# Altium PCB Sintetizador_BA.PcbDoc
Units mm, origin at the board's own origin, x right, y up, seen from the top; angles counter-clockwise.
Board outline 64.64 x 55 mm, 2 copper layers (Top Layer, Bottom Layer), stack 1.571 mm thick; 53 components, 50 nets, 183 pads, 2 vias.
Unrouted connection lines stored in the file: 2.
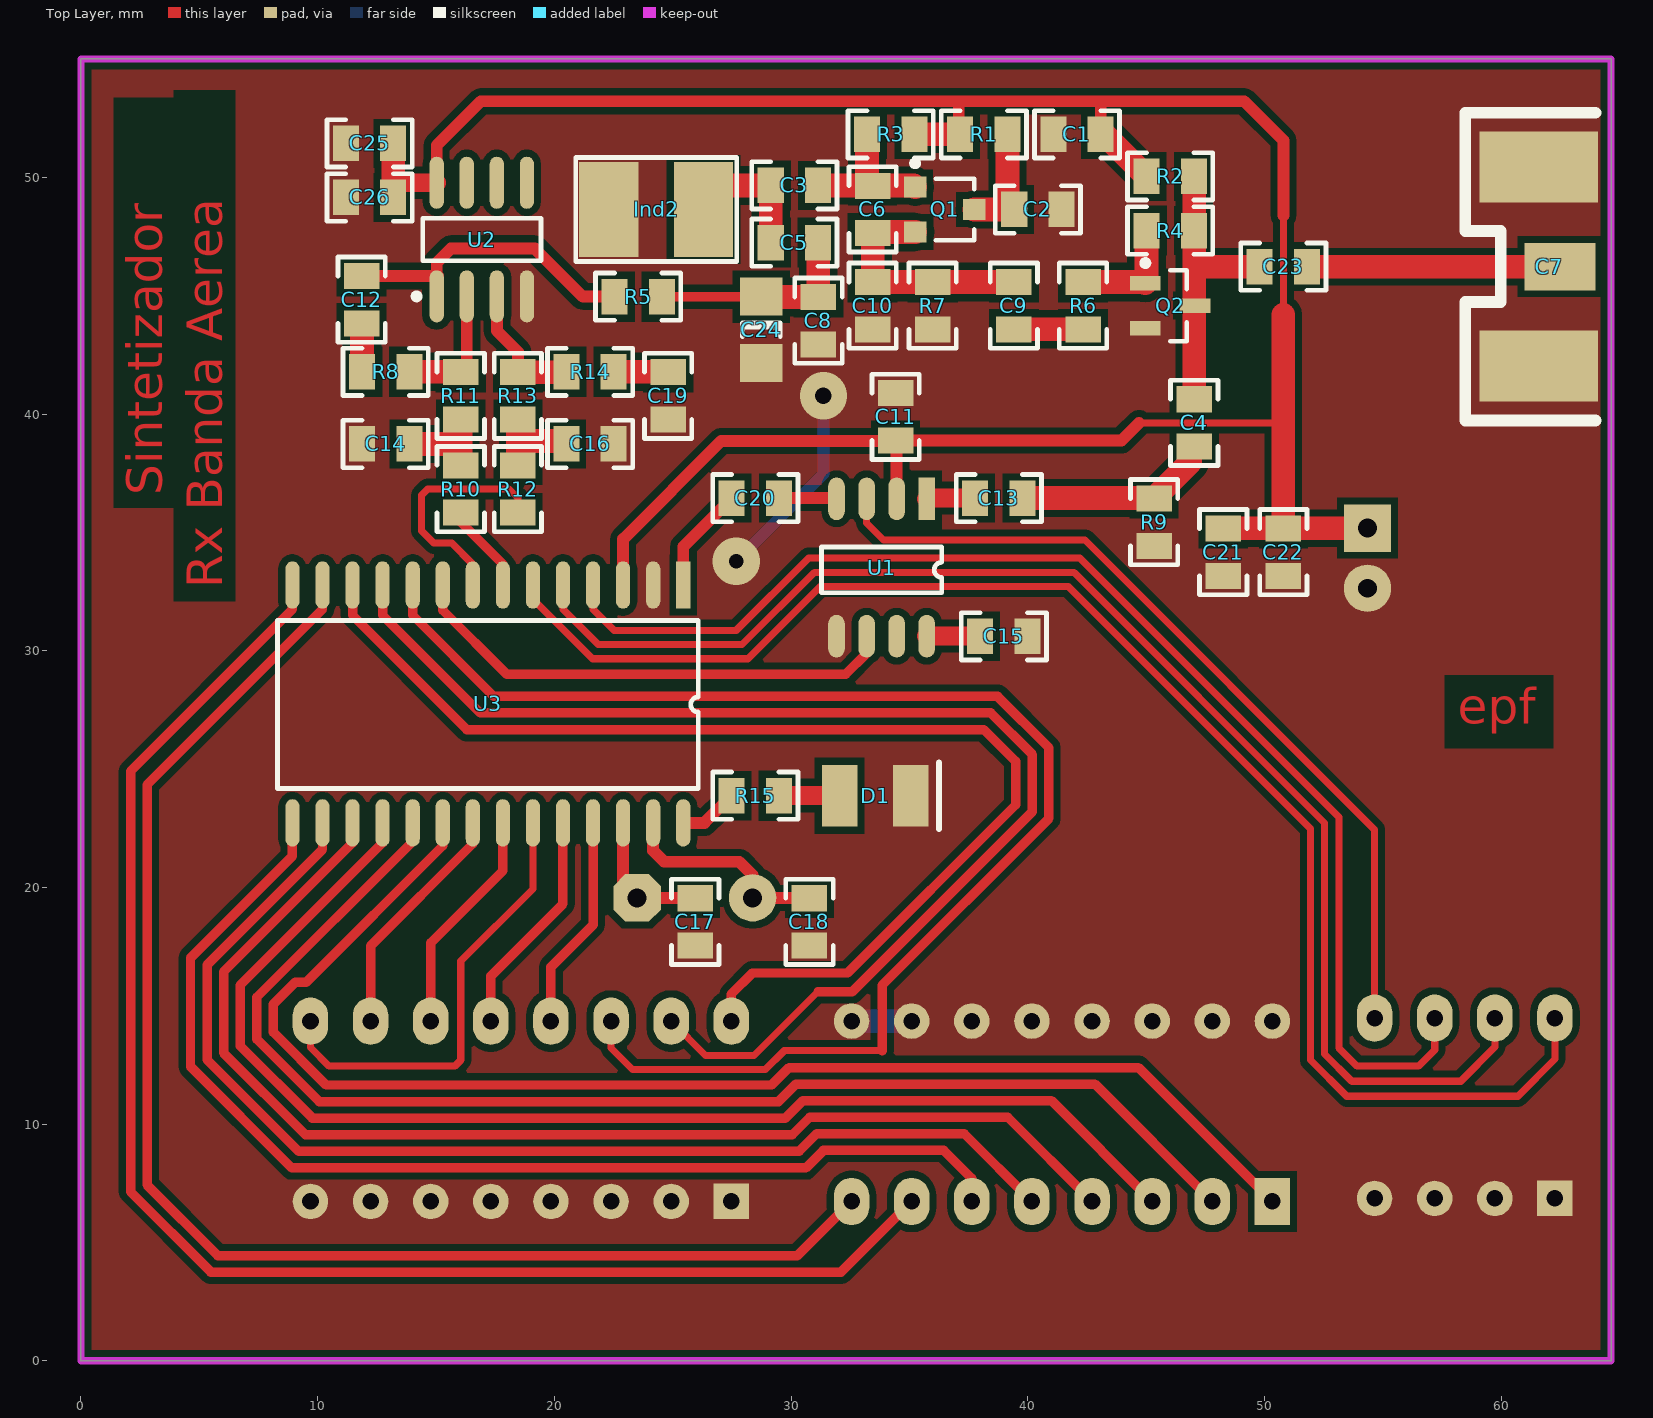
[diagram p0: Top Layer view]
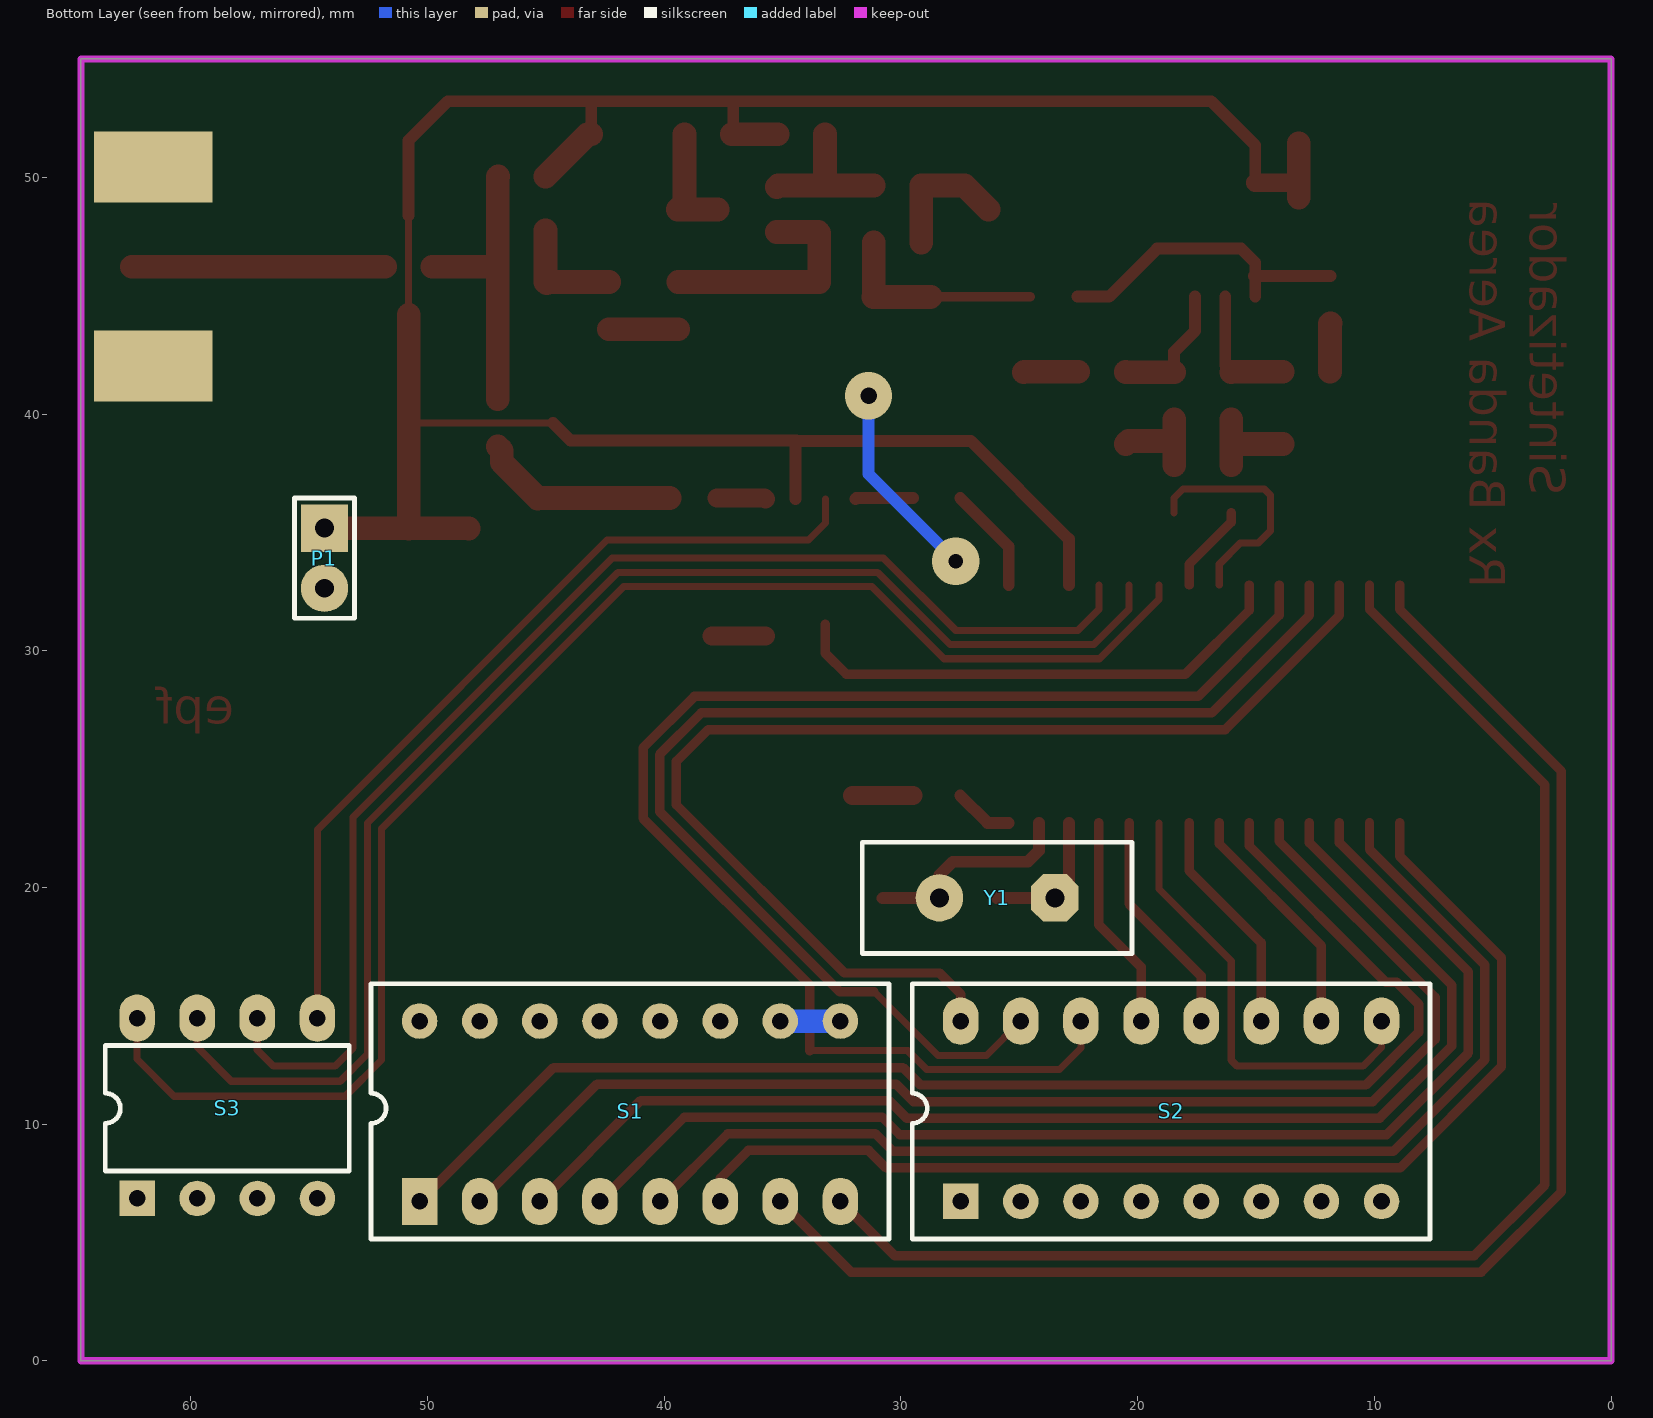
[diagram p1: Bottom Layer view, seen from below]
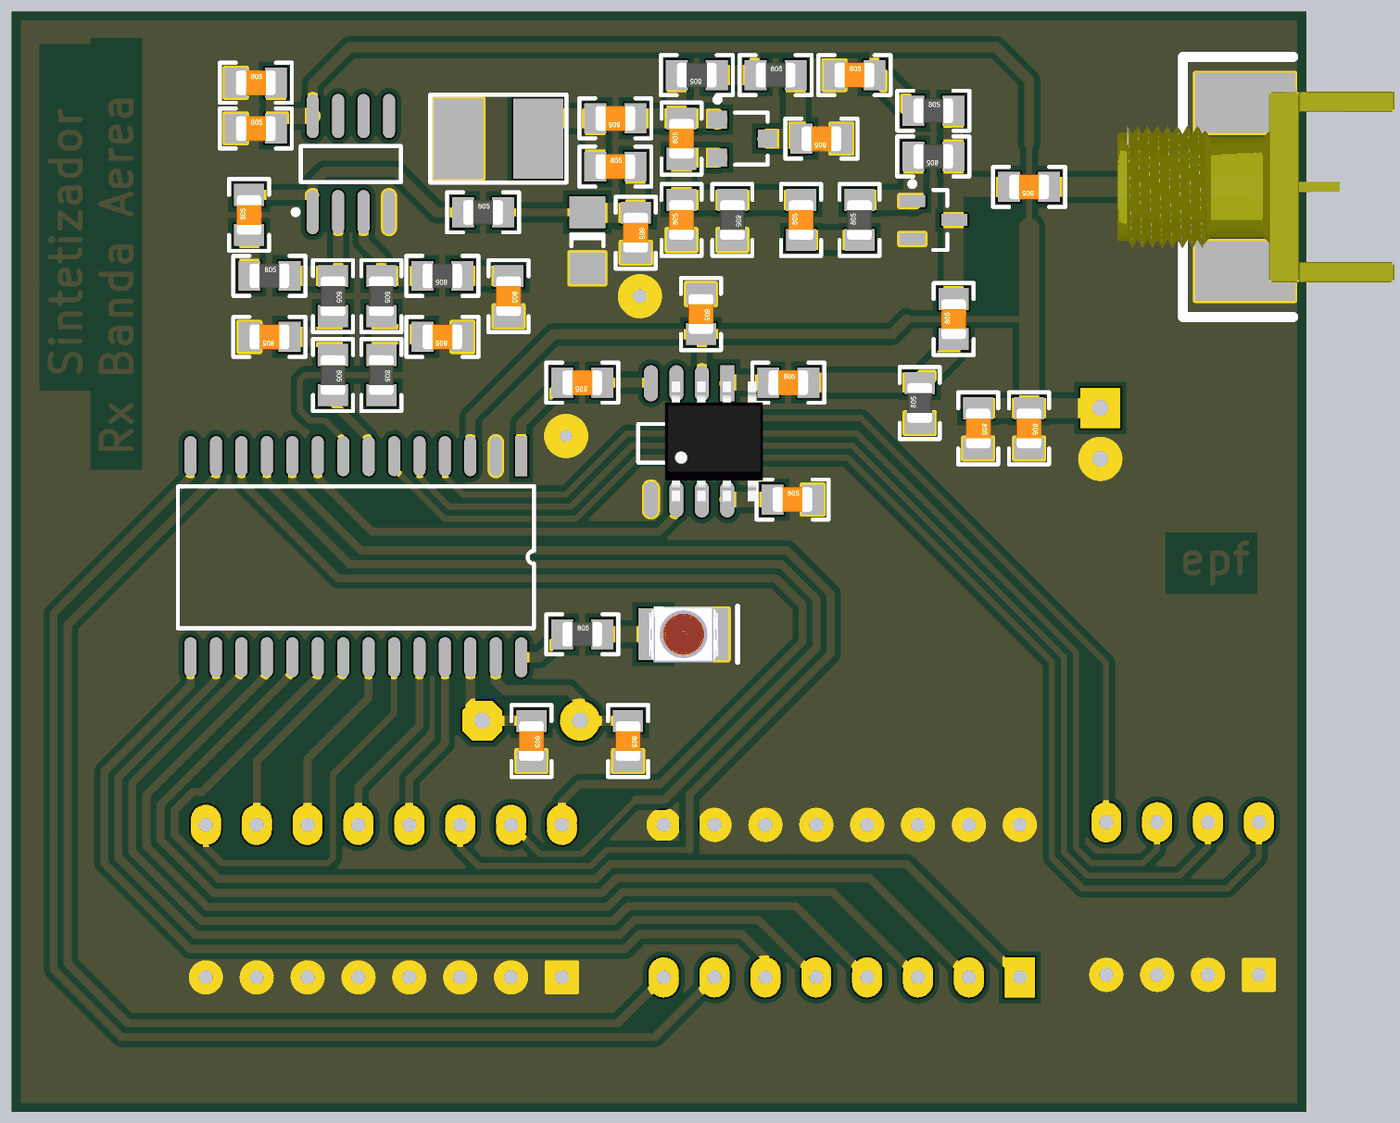
[diagram p2: 3D render of the assembled board from above, using the file's embedded part models]

## Layer stack, top to bottom
Top Layer: signal copper 0.0356
Dielectric: core 1.5, FR-4, Dk 4.8
Bottom Layer: signal copper 0.0356

## Board outline
0,0 0,55 64.643,55 64.643,0

## Design rules (kind name [scope] priority, off if disabled: settings)
Clearance [All] p1: gap=0.3
PolygonConnect [All] p1: connectstyle=Direct reliefconductorwidth=0.254 reliefentries=4 polygonreliefangle="90 Angle"
RoomDefinition Sintetizador_BA [InComponentClass('Sintetizador_BA')] p1: confinementstyle=ConfineIn formatcopy=TRUE lockcomponents=FALSE outline -0.381,0.127 74.422,0.127 74.422,55.372 -0.381,55.372
RoutingVias [All] p1: holewidth=0.6 width=2 viastyle="Through Hole" minholewidth=0.3 minwidth=1.27 maxholewidth=1 maxwidth=3
SilkscreenOverComponentPads [All] p1: minsilkscreentomaskgap=0
SolderMaskExpansion [All] p1: expansion=0.102
TestPointUsage [All] p1: valid=0 allowmultiple=FALSE
Testpoint [All] p1: side=15 testpointundercomponent=TRUE minsize=1.016 maxsize=2.54 preferedsize=1.524 minholesize=0 maxholesize=1.016 preferedholesize=0.813 testpointgrid=0.025 style=1023 order=0-112345678
Width [All] p1: maxlimit=3 minlimit=0.3 preferedwidth=1
23 further rules are at their usual default settings.

## Components (designator, comment, footprint, x,y, rotation, side; value= is the part's Value field where it differs from the comment)
C1 "Capacitor" 0805_CAP 42.081,51.816 r0 top
C2 "Capacitor" 0805_CAP 40.43,48.641 r180 top
C3 "Capacitor" 0805_CAP 30.143,49.657 r180 top
C4 "Capacitor" 0805_CAP 47.034,39.624 r270 top
C5 "Capacitor" 0805_CAP 30.143,47.244 r0 top
C6 "Capacitor" 0805_CAP 33.445,48.641 r270 top
C7 "SMA" SMAL2 62.484,46.228 r270 top
C8 "Capacitor" 0805_CAP 31.159,43.942 r90 top
C9 "Capacitor" 0805_CAP 39.414,44.577 r270 top
C10 "Capacitor" 0805_CAP 33.445,44.577 r270 top
C11 "Capacitor" 0805_CAP 34.417,39.878 r90 top
C12 "Capacitor" 0805_CAP 11.855,44.831 r270 top
C13 "Capacitor" 0805_CAP 38.779,36.449 r0 top
C14 "Capacitor" 0805_CAP 12.871,38.735 r180 top
C15 "Capacitor" 0805_CAP 38.989,30.607 r0 top
C16 "Capacitor" 0805_CAP 21.507,38.735 r180 top
C17 "Capacitor" 0805_CAP 25.952,18.542 r90 top
C18 "Capacitor" 0805_CAP 30.778,18.542 r90 top
C19 "Capacitor" 0805_CAP 24.809,40.767 r90 top
C20 "Capacitor" 0805_CAP 28.492,36.449 r180 top
C21 "Capacitor" 0805_CAP 48.26,34.163 r90 top
C22 "Capacitor" 0805_CAP 50.8,34.163 r90 top
C23 "Capacitor" 0805_CAP 50.8,46.228 r180 top
C24 "Cap Semi" C1206 28.746,43.561 r270 top
C25 "Capacitor" 0805_CAP 12.192,51.435 r0 top
C26 "Capacitor" 0805_CAP 12.192,49.149 r0 top
D1 "LED" PLCC-2Rojo 32.048,23.876 r270 top
Ind2 "Ind2" Ind_4mm 24.301,48.641 r0 top
P1 "Header 2" HDR1X2 54.356,35.179 r270 bottom
Q1 "BFS17" SOT-23 36.493,48.641 r270 top
Q2 "BFS17" SOT23_N 46.018,44.577 r0 top
R1 "Resistor" 0805_RES 38.144,51.816 r0 top
R2 "Resistor" 0805_RES 46.018,50.038 r0 top
R3 "Resistor" 0805_RES 34.207,51.816 r180 top
R4 "Resistor" 0805_RES 46.018,47.752 r180 top
R5 "Resistor" 0805_RES 23.539,44.958 r0 top
R6 "Resistor" 0805_RES 42.335,44.577 r270 top
R7 "Resistor" 0805_RES 35.985,44.577 r90 top
R8 "Resistor" 0805_RES 12.871,41.783 r0 top
R9 "Resistor" 0805_RES 45.339,35.433 r270 top
R10 "Resistor" 0805_RES 16.046,36.83 r90 top
R11 "Resistor" 0805_RES 16.046,40.767 r90 top
R12 "Resistor" 0805_RES 18.459,36.83 r90 top
R13 "Resistor" 0805_RES 18.459,40.767 r90 top
R14 "Resistor" 0805_RES 21.507,41.783 r180 top
R15 "Resistor" 0805_RES 28.492,23.876 r0 top
S1 "SW-DIP8" DIP-16-KEY#1 50.336,6.731 r180 bottom
S2 "SW-DIP8" DIP-16-KEY#2 27.476,6.731 r180 bottom
S3 "SW-DIP4" DIP-8 58.464,10.668 r180 bottom
U1 "DualModule" SO-8_2 35.731,36.415 r270 top
U2 "MC1458D" 751-05_N 16.935,47.371 r90 top
U3 "PLL" SOG28 25.444,32.776 r270 top
Y1 "ECS-10-13-1" HC-49U 25.936,19.558 r0 bottom

## Footprints (in the part's own frame and the unit in brackets; to place one, negate y for a bottom-side part, rotate by r counter-clockwise, add the part's x,y. Pads: shape width x height; smd on the part's side, far side on the other; paste and mask are expansions set on the pad)
751-05_N [mm] "SOIC, 8-Leads, Body 4.9x3.9mm, Pitch 1.27mm, IPC Medium Density"
  oval 2.2x0.6 smd: 1(-2.4,1.905) 2(-2.4,0.635) 3(-2.4,-0.635) 4(-2.4,-1.905) 5(2.4,-1.905) 6(2.4,-0.635) 7(2.4,0.635) 8(2.4,1.905)
  silkscreen extent -2.52,-2.5 0.9,2.88, body extent -1.95,-2.45 1.95,2.45, height 1.75
0805_CAP [mm]
  rect 1.1x1.5 smd: 1(-1,0) 2(1,0)
  silkscreen extent -1.8,-1 1.8,1, body extent -1,-0.62 1,0.63, height 0.78
0805_RES [mm]
  rect 1.1x1.5 smd: 1(-1,0) 2(1,0)
  silkscreen extent -1.8,-1 1.8,1, body extent -1,-0.62 1,0.63, height 0.78
C1206 [mm] "Chip Capacitor; Body 3.2 x 1.6 mm (LxW typ)"
  rect 1.6x1.8 smd: 1(-1.4,0) 2(1.4,0)
  silkscreen extent -0.3,-0.8 0.3,0.8
DIP-8 [mm] "DIP; 8 Leads; Row Spacing 7.62 mm; Pitch 2.54 mm"
  rect 1.5x1.5 hole 0.7: 1(-3.81,-3.81)
  round 1.5 hole 0.7: 2(-1.27,-3.81) 3(1.27,-3.81) 4(3.81,-3.81)
  oval 1.5x2 hole 0.7: 5(3.81,3.81) 6(1.27,3.81) 7(-1.27,3.81) 8(-3.81,3.81)
  silkscreen extent -5.15,-2.65 5.15,2.65
DIP-16-KEY#1 [mm] "DIP; 16 Leads; Row Spacing 7.62 mm; Pitch 2.54 mm"
  rect 1.5x2 hole 0.7: 1(0,0)
  oval 1.5x2 hole 0.7: 2(2.54,0) 3(5.08,0) 4(7.62,0) 5(10.16,0) 6(12.7,0) 7(15.24,0) 8(17.78,0)
  round 1.5 hole 0.7: 9(17.78,7.62) 10(15.24,7.62) 11(12.7,7.62) 12(10.16,7.62) 13(7.62,7.62) 14(5.08,7.62) 15(2.54,7.62) 16(0,7.62)
  silkscreen extent -2.05,-1.59 19.83,9.2
DIP-16-KEY#2 [mm] "DIP; 16 Leads; Row Spacing 7.62 mm; Pitch 2.54 mm"
  rect 1.5x1.5 hole 0.7: 1(0,0)
  round 1.5 hole 0.7: 2(2.54,0) 3(5.08,0) 4(7.62,0) 5(10.16,0) 6(12.7,0) 7(15.24,0) 8(17.78,0)
  oval 1.5x2 hole 0.7: 9(17.78,7.62) 10(15.24,7.62) 11(12.7,7.62) 12(10.16,7.62) 13(7.62,7.62) 14(5.08,7.62) 15(2.54,7.62) 16(0,7.62)
  silkscreen extent -2.05,-1.59 19.83,9.2
HC-49U [mm] "Quartz Crystal, Thru-Hole; 2 Leads; Body 11.35 x 4.65 x 13.46 mm (LxWxH max)"
  oct 2x2 hole 0.8: 1(-2.44,0)
  round 2 hole 0.8: 2(2.44,0)
  silkscreen extent -5.7,-2.35 5.7,2.35
HDR1X2 [mm] "Connector; Header; 2 Position"
  rect 2x2 hole 0.8: 1(0,0)
  round 2 hole 0.8: 2(2.54,0)
  silkscreen extent -1.27,-1.27 3.81,1.27
Ind_4mm [mm]
  rect 2.5x4 smd: 1(-2,0) 2(2,0)
  silkscreen extent -3.4,-2.2 3.4,2.2
PLCC-2Rojo [mm]
  rect 2.6x1.5 smd: 1(0,0) 2(0,3)
  silkscreen extent -1.4,4.2 1.4,4.2, body extent -1.4,-0.25 1.4,3.25, height 1.75
SMAL2 [mm]
  rect 2x3 smd: 1(0,0)
  rect 3x5 smd: 2(-4.2,-0.9) 4(4.2,-0.9)
  rect 3x5 smd far side: 3(-4.2,-0.9) 5(4.2,-0.9)
  silkscreen extent -6.5,-4 6.5,1.5, body extent -4.76,-2.95 4.76,10.88, height 4.06
SO-8_2 [mm]
  rect 1.8x0.7 smd: 1(0,0)
  oval 1.8x0.7 smd: 2(0,-1.27) 3(0,-2.54) 4(0,-3.81) 5(5.8,-3.81) 6(5.8,-2.54) 7(5.8,-1.27) 8(5.8,0)
  silkscreen extent 2.03,-4.44 3.97,0.64, body extent -0.09,-4.38 5.9,0.52, height 1.6
SOG28 [mm]
  rect 2x0.6 smd: 1(0,0)
  oval 2x0.6 smd: 2(0,-1.27) 3(0,-2.54) 4(0,-3.81) 5(0,-5.08) 6(0,-6.35) 7(0,-7.62) 8(0,-8.89) 9(0,-10.16) 10(0,-11.43) 11(0,-12.7) 12(0,-13.97) 13(0,-15.24) 14(0,-16.51) 15(10.05,-16.51) 16(10.05,-15.24) 17(10.05,-13.97) 18(10.05,-12.7) 19(10.05,-11.43) 20(10.05,-10.16) 21(10.05,-8.89) 22(10.05,-7.62) 23(10.05,-6.35) 24(10.05,-5.08) 25(10.05,-3.81) 26(10.05,-2.54) 27(10.05,-1.27) 28(10.05,0)
  silkscreen extent 1.5,-17.14 8.6,0.64, body extent 1.5,-17.15 8.6,0.64, height 1.5
SOT23_N [mm] "SOT23, 3-Leads, Body 2.9x1.3mm, Pitch 0.95mm, Lead Span 2.3mm, IPC Medium Density"
  rect 1.3x0.6 smd: 1(-1.05,0.95) 2(-1.05,-0.95) 3(1.05,0)
  silkscreen extent -1.17,-1.5 0.7,1.92, body extent -0.7,-1.5 0.7,1.5, height 1.1
SOT-23 [mm] "SOT-23; 3 Leads; Body 3.0 x 2.6 mm, inc. leads (LxW max)"
  rect 0.9x0.95 smd: 1(-0.95,-1.25) 2(0.95,-1.25) 3(0,1.25)
  silkscreen extent -2.07,-1.37 1.3,1.25

## Part data
C1 C2 C3 C4 C5 C6 C8 C9 C10 C11 C12 C13 C14 C15 C16 C17 C18 C19 C20 C21 C22 C23 C25 C26: library part Cap
C24: "Capacitor (Semiconductor SIM Model)"
D1: library part LED1
P1: "Header, 2-Pin"
Q1 Q2: "NPN 1 GHz Wideband Transistor"
R1 R2 R3 R4 R5 R6 R7 R8 R9 R10 R11 R12 R13 R14 R15: library part Res
S1 S2: "4009 Series DIP Switch, Raised actuator"
S3: "DIP Switch"
U1: library part MC12054ASD
U2: "Dual Operational Amplifier, Internally Compensated"
U3: library part MC145152P2, "PLL paralelo doble modulo"
Y1: "Crystal Oscillator"

## Via types
v1: diameter 2, hole 0.6, Top Layer to Bottom Layer, 1 vias
v2: diameter 2, hole 0.7, Top Layer to Bottom Layer, 1 vias

## Nets (pads, with @x,y where several pads share a name; then routed paths per layer and width w, separated by ;. In a path a pad name is that pad's centre, name@x,y a point inside that pad or via, vN(x,y) a via of type N, cw(c..) or ccw(c..) an arc to the next point about the centre after c; other vN are vias at no path point)
A0: S2.9 U3.23 | length 19.2
  Top Layer w0.3: S2.9 9.696,13.23 10.48,12.446 15.792,12.446 16.046,12.7 16.046,16.891 19.094,19.939 U3.23
A1: S2.10 U3.21 | length 10.2
  Top Layer w0.4: S2.10 12.236,17.526 16.554,21.844 U3.21
A2: S2.11 U3.22 | length 9.6
  Top Layer w0.4: S2.11 14.776,17.653 17.824,20.701 U3.22
A3: S2.12 U3.24 | length 9.6
  Top Layer w0.4: S2.12 17.316,16.256 20.364,19.304 U3.24
A4: S2.13 U3.25 | length 9.1
  Top Layer w0.4: S2.13 19.856,16.637 21.634,18.415 U3.25
A5: S2.14 U3.10 | length 59.5
  Top Layer w0.3: S2.14 22.396,13.208 23.303,12.301 28.911,12.301 29.711,13.101 33.846,13.101
  Top Layer w0.4: U3.10 14.014,31.496 17.44,28.07 38.724,28.07 40.894,25.9 40.894,22.912 33.846,15.864 33.846,13.101
FIN: C20.1 U1.4 | length 2.4
  Top Layer w0.5: C20.1 31.887,36.449 U1.4
GND: C1.1 C2.1 C7.2 C7.3 C7.4 C7.5 C8.1 C10.2 C11.2 C14.2 C15.2 C16.1 C17.1 C18.1 C19.1 C21.1 C22.1 C24.2 C25.1 C26.1 D1.2 Ind2.1 P1.2 Q2.2 R7.1 R9.2 S1.9 S1.10 S1.11 S1.12 S1.13 S1.14 S1.15 S1.16 S2.1 S2.2 S2.3 S2.4 S2.5 S2.6 S2.7 S2.8 S3.1 S3.2 S3.3 S3.4 U1.5 U2.4 U3.2 | length 11.1
  Bottom Layer w0.5: v1(27.686,33.782) 31.369,37.465 v2(31.369,40.767)
  Bottom Layer w1: S1.9 S1.10
LD: R15.1 U3.28 | length 2.5
  Top Layer w0.5: U3.28 26.342,22.726 R15.1
MC: U1.6 U3.9 | length 21.7
  Top Layer w0.4: U3.9 15.284,31.706 17.979,29.011 32.313,29.011 33.191,29.889 U1.6@33.191,31.115
N0: S2.15 U3.11 | length 53.7
  Top Layer w0.3: S2.15 26.386,12.901 28.439,12.901 31.139,15.601
  Top Layer w0.4: U3.11 12.744,31.496 16.87,27.37 38.434,27.37 40.194,25.61 40.194,23.202 32.593,15.601 31.139,15.601
N1: S2.16 U3.12 | length 50.2
  Top Layer w0.4: U3.12 11.474,31.496 16.3,26.67 38.144,26.67 39.494,25.32 39.494,23.492 32.385,16.383 28.365,16.383 27.476,15.494 S2.16
N2: S1.8 U3.13 | length 60.4
  Top Layer w0.4: U3.13 10.204,31.75 2.794,24.34 2.794,7.431 5.78,4.445 30.27,4.445 S1.8
N3: S1.7 U3.14 | length 64.1
  Top Layer w0.4: U3.14 8.934,31.75 2.094,24.91 2.094,7.141 5.49,3.745 32.11,3.745 S1.7
N4: S1.6 U3.15 | length 48.6
  Top Layer w0.4: U3.15 8.934,21.324 4.628,17.018 4.628,12.429 8.906,8.151 30.63,8.151 31.369,8.89 36.449,8.89 37.636,7.703 S1.6
N5: S1.5 U3.16 | length 50
  Top Layer w0.4: U3.16 10.204,21.605 5.328,16.729 5.328,12.719 9.196,8.851 30.34,8.851 31.079,9.59 37.317,9.59 S1.5
N6: S1.4 U3.17 | length 51.9
  Top Layer w0.4: U3.17 11.474,21.885 6.028,16.439 6.028,13.009 9.486,9.551 30.05,9.551 30.789,10.29 39.157,10.29 S1.4
N7: S1.3 U3.18 | length 53.8
  Top Layer w0.4: U3.18 12.744,21.888 6.728,15.872 6.728,13.299 9.776,10.251 29.76,10.251 30.499,10.99 40.997,10.99 S1.3
N8: S1.2 U3.19 | length 55.7
  Top Layer w0.4: U3.19 14.014,21.945 7.428,15.359 7.428,13.589 10.066,10.951 29.47,10.951 30.209,11.69 42.837,11.69 S1.2
N9: S1.1 U3.20 | length 57.9
  Top Layer w0.4: U3.20 15.284,21.761 9.525,16.002 9.061,16.002 8.128,15.069 8.128,13.879 10.356,11.651 29.18,11.651 29.919,12.39 44.677,12.39 S1.1
NetC2_2: C2.2 Q1.3 R1.2 | length 5
  Top Layer w1: Q1.3 C2.2 39.144,48.927 R1.2
NetC3_1: C3.1 C6.1 Q1.1 R3.2 | length 6.4
  Top Layer w1: C3.1 C6.1@33.429,49.657 ; R3.2 33.207,49.879 C6.1@33.429,49.657 ; C6.1 C6.1@33.429,49.657 ; Q1.1 35.177,49.657 C6.1@33.429,49.657
NetC3_2: C3.2 C5.1 Ind2.2 | length 5.7
  Top Layer w1: Ind2.2 27.317,49.657 C3.2 C5.1
NetC4_1: C4.1 C23.2 Q2.3 R2.2 R4.1 | length 12.2
  Top Layer w1: R2.2 47.034,50.022 47.034,47.752 47.034,46.101 ; C4.1 47.034,46.101 ; C23.2 47.161,46.228 47.034,46.101
NetC5_2: C5.2 C8.2 C24.1 R5.2 | length 8.9
  Top Layer w0.4: R5.2 28.743,44.958 C24.1 ; C8.2@31.143,44.958 C8.2
  Top Layer w1: C24.1 28.765,44.942 C8.2 ; C8.2@31.143,44.958 C5.2
NetC6_2: C6.2 C9.1 C10.1 Q1.2 R7.2 | length 9.9
  Top Layer w1: Q1.2 33.495,47.691 C6.2 C10.1 R7.2 C9.1
NetC7_1: C7.1 C23.1 | length 10.7
  Top Layer w1: C23.1 C7.1
NetC9_2: C9.2 R6.2 | length 2.9
  Top Layer w1: C9.2 R6.2
NetC12_2: C12.2 R8.1 | length 2.1
  Top Layer w1: C12.2 11.871,43.815 R8.1
NetC13_1: C13.1 U1.1 | length 2.1
  Top Layer w0.8: U1.1 35.765,36.449 C13.1
NetC14_1: C14.1 R10.2 R11.1 | length 4.1
  Top Layer w1: C14.1 16.046,38.735 ; R10.2 16.046,38.735 ; R11.1 16.046,38.735
NetC15_1: C15.1 U1.8 | length 2.3
  Top Layer w0.5: C15.1@37.981,30.615 C15.1
  Top Layer w0.8: U1.8 C15.1@37.981,30.615
NetC16_2: C16.2 R12.2 R13.1 | length 4
  Top Layer w1: R12.2 18.459,38.862 ; R13.1 18.459,38.862 ; C16.2 20.38,38.862 18.459,38.862
NetC17_2: C17.2 U3.26 Y1.1 | length 5.9
  Top Layer w0.5: U3.26 22.904,20.15 Y1.1 25.936,19.558 C17.2
NetC18_2: C18.2 U3.27 Y1.2 | length 9.2
  Top Layer w0.5: U3.27 24.174,21.546 24.638,21.082 27.813,21.082 28.376,20.519 Y1.2 30.762,19.558 C18.2
NetC19_2: C19.2 R14.1 | length 2.3
  Top Layer w1: R14.1 24.793,41.783 C19.2
NetC20_2: C20.2 U3.1 | length 4.5
  Top Layer w0.5: U3.1 25.444,34.401 C20.2
NetD1_1: D1.1 R15.2 | length 2.6
  Top Layer w0.8: R15.2 D1.1
NetQ2_1: Q2.1 R4.2 R6.1 | length 4.9
  Top Layer w1: R6.1 44.918,45.577 Q2.1 45.018,45.577 R4.2
NetR8_2: R8.2 R11.2 U2.2 | length 5.5
  Top Layer w0.5: R11.2 16.046,41.799 16.3,42.053 U2.2
  Top Layer w1: R8.2 16.03,41.783 R11.2
NetR10_1: R10.1 U3.7 | length 3.8
  Top Layer w0.4: R10.1 16.046,35.433 17.824,33.655 U3.7
NetR12_1: R12.1 U3.8 | length 10.1
  Top Layer w0.3: U3.8 16.554,33.655 15.665,34.544 14.903,34.544 14.395,35.052 14.395,36.576 14.649,36.83 18.078,36.83 18.459,36.449 R12.1
NetR13_2: R13.2 R14.2 U2.3 | length 5.6
  Top Layer w0.5: U2.3 17.57,43.517 18.459,42.628 R13.2
  Top Layer w1: R13.2 20.491,41.767 R14.2
OL: C4.2 C13.2 R9.1 | length 8.5
  Top Layer w1: C13.2 45.323,36.449 R9.1 46.863,37.957 46.863,38.453 C4.2
RA0: S3.6 U3.4 | length 54.5
  Top Layer w0.3: U3.4 21.634,31.75 22.523,30.861 27.686,30.861 30.734,33.909 42.21,33.909 53.143,22.976 53.143,13.208 53.905,12.446 56.515,12.446 57.194,13.125 S3.6
RA1: S3.7 U3.5 | length 58.7
  Top Layer w0.3: U3.5 20.364,31.75 21.853,30.261 27.935,30.261 30.983,33.309 41.962,33.309 52.543,22.728 52.543,12.959 53.691,11.811 58.293,11.811 59.734,13.252 S3.7
RA2: S3.8 U3.6 | length 63.1
  Top Layer w0.3: U3.6 19.094,32.171 21.604,29.661 28.183,29.661 31.231,32.709 41.713,32.709 51.943,22.479 51.943,12.711 53.478,11.176 60.706,11.176 62.274,12.744 S3.8
SW: S3.5 U1.3 | length 35.8
  Top Layer w0.3: U1.3 33.191,35.389 33.909,34.671 42.418,34.671 54.654,22.435 S3.5
VC: C12.1 R5.1 U2.1 | length 13.3
  Top Layer w0.5: C12.1 U2.1@15.03,45.831 ; U2.1 U2.1@15.03,45.831 ; U2.1@15.097,45.831 U2.1@15.03,45.831 ; R5.1 21.209,44.958 19.177,46.99 15.621,46.99 15.03,46.399 U2.1@15.03,45.831
VCC: C1.2 C11.1 C21.2 C22.2 C25.2 C26.2 P1.1 R1.1 R2.1 R3.1 U1.2 U2.8 U3.3 | length 107.3
  Top Layer w0.3: 44.704,39.624 50.8,39.624 ; 50.8,44.196 50.8,48.387
  Top Layer w0.5: U2.8 15.03,51.352 16.891,53.213 37.084,53.213 ; U3.3 22.904,34.715 27.051,38.862 34.477,38.862 34.461,38.846 U1.2 ; C11.1 43.958,38.878 44.704,39.624 ; R1.1 37.084,51.876 37.084,53.213 ; C1.2 43.081,53.185 43.053,53.213 ; 50.8,48.387 50.8,51.562 49.149,53.213 43.053,53.213 ; 37.084,53.213 43.053,53.213
  Top Layer w0.8: 13.192,49.911 13.332,49.771 U2.8
  Top Layer w1: C26.2 13.192,49.911 C25.2 ; R3.1 R1.1 ; C1.2 43.24,51.816 R2.1 ; C21.2 48.276,35.179 C22.2@50.8,35.179 ; C22.2 C22.2@50.8,35.179 ; 50.8,44.196 50.8,39.624 C22.2@50.8,35.179 ; P1.1 C22.2@50.8,35.179
pads on no net: U1.7 U2.5 U2.6 U2.7

## Polygon pours and split planes (outlines as drawn)
GND on Top Layer "GND_Top" (solid, remove dead copper): 0,55 0,0.508 -0.381,0.127 -0.254,0 64.643,0 64.643,55

## Keep-outs
Keep-Out Layer:
  the board outline again, w0.3

## Other copper
Top Layer:
  text "Sintetizador" at 3.429,36.576 h1.5 r90
  text "Rx Banda Aerea" at 5.969,32.639 h1.5 r90
  text "epf" at 58.166,26.924 h1.5

## Dimensions
0,0 to 64.643,0 on Mechanical 1
0,0 to 0,55 on Mechanical 1